# Altium PCB PCB1.PcbDoc
Units mm, origin at the board's own origin, x right, y up, seen from the top; angles counter-clockwise.
Board outline 17.5 x 27 mm, 2 copper layers (Top Layer, Bottom Layer); 11 components, 6 nets, 29 pads, 102 vias.
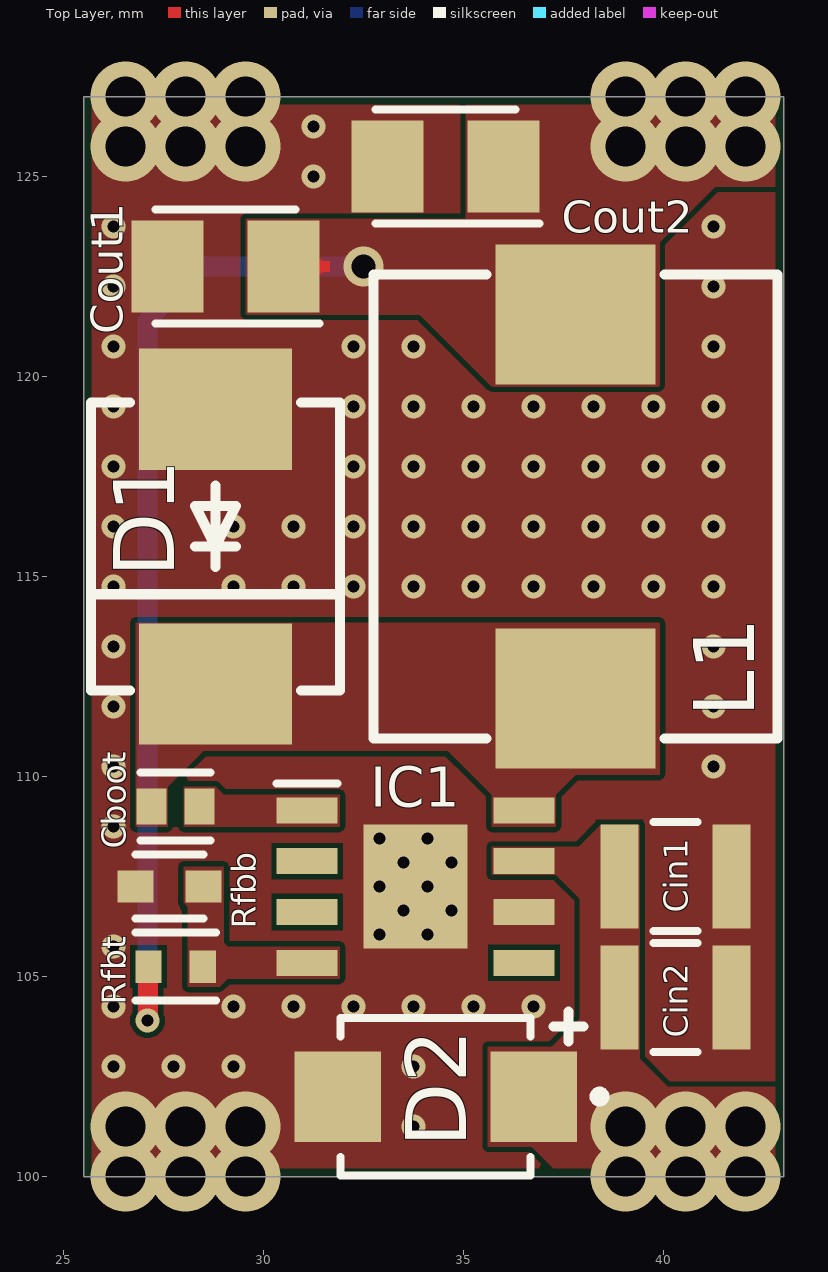
[diagram p0: Top Layer view]
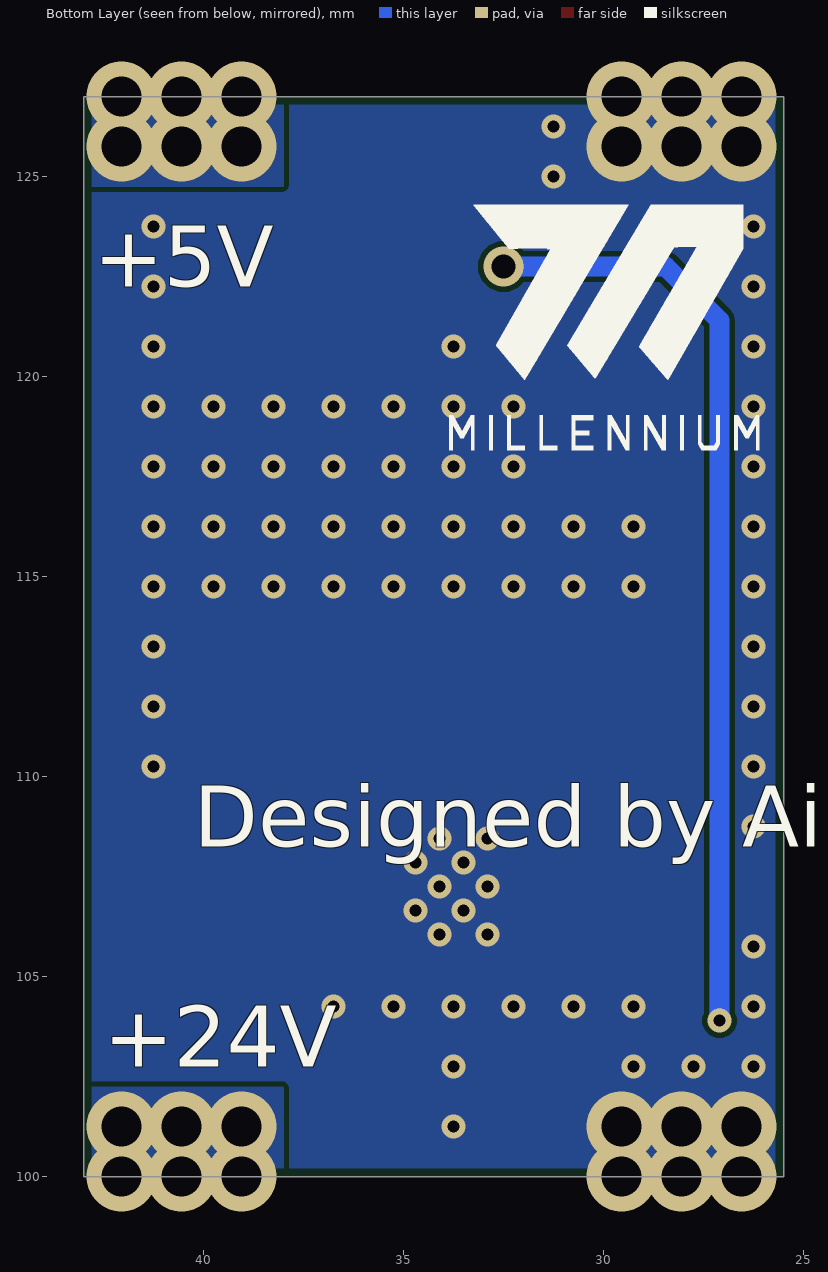
[diagram p1: Bottom Layer view, seen from below]
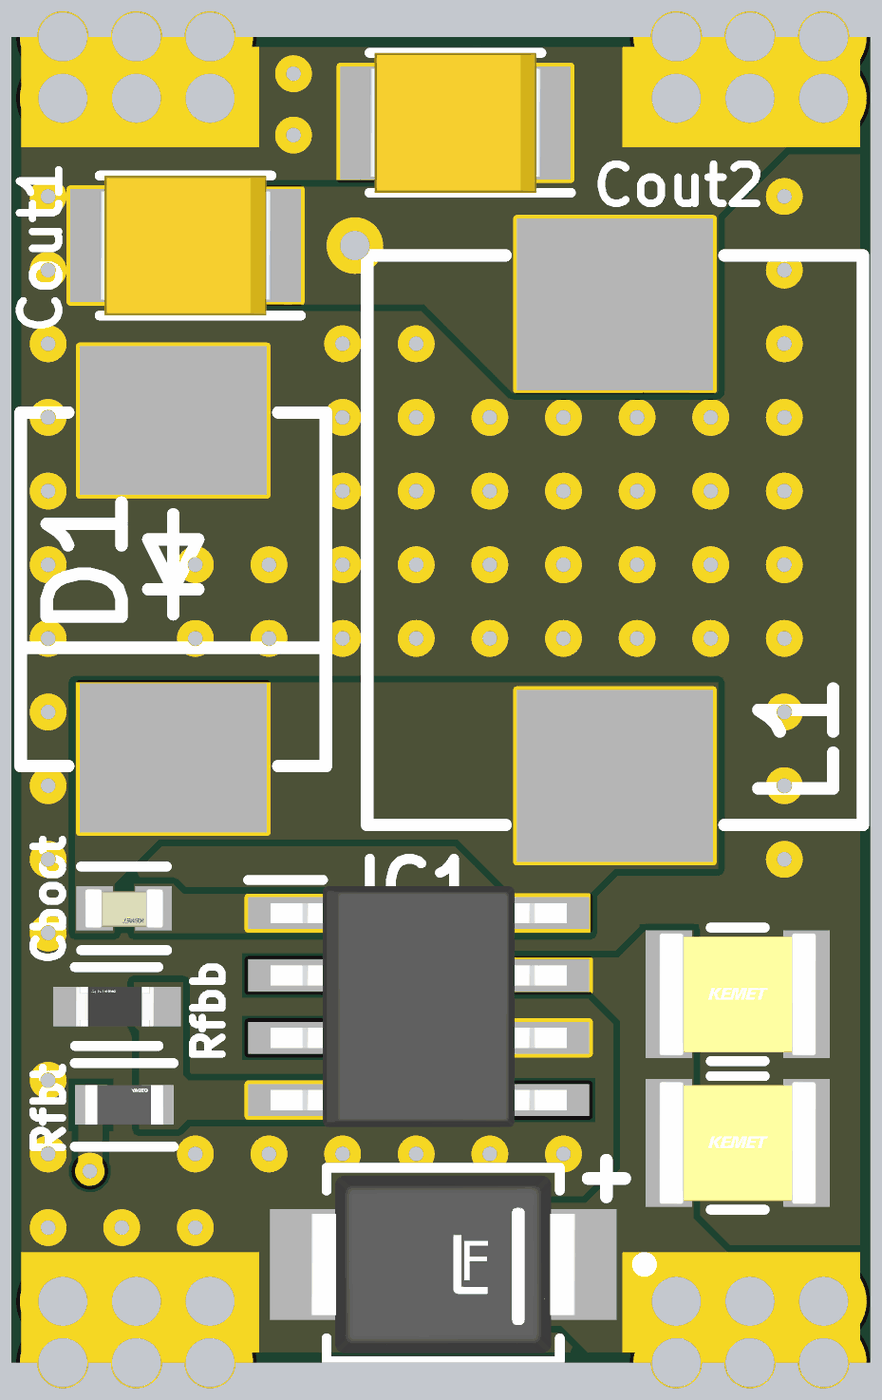
[diagram p2: 3D render of the assembled board from above, using the file's embedded part models]

## Layer stack, top to bottom
Top Solder: solder mask 0.0102, Solder Resist, Dk 3.5
Top Layer: signal copper 0.0356
Dielectric 1: dielectric 0.32, FR-4, Dk 4.8
Bottom Layer: signal copper 0.0356
Bottom Solder: solder mask 0.0102, Solder Resist, Dk 3.5

## Board outline
25.5,100 25.5,127 43,127 43,100

## Design rules (kind name [scope] priority, off if disabled: settings)
BoardOutlineClearance [All] p1: gap=0.2 ignorepadtopadclearanceinfootprint=FALSE
Clearance [All] p1: gap=0.127 ignorepadtopadclearanceinfootprint=FALSE except(0.25: Arc-Hole Track-Hole SMDPad-Hole THPad-Hole Via-Hole Fill-Hole Poly-Hole Region-Hole Text-Hole)
ComponentClearance [All] p1: gap=0.127 collisioncheckmode=3 verticalgap=0.127 showdistances=TRUE
DiffPairsRouting [All] p1: maxlimit=0.254 minlimit=0.127 mostfreqgap=0.127 toplayer_minwidth=0.127 toplayer_maxwidth=25.4 toplayer_prefwidth=0.127 bottomlayer_minwidth=0.127 bottomlayer_maxwidth=25.4 bottomlayer_prefwidth=0.127 maxuncoupledlength=12.7
Height [All] p1: minheight=0 maxheight=1816.048 prefheight=12.7
HoleSize [All] p1: absolutevalues=TRUE maxlimit=6.3 minlimit=0.3 maxpercent=80.000 minpercent=20.000
HoleToHoleClearance [All] p1: gap=0.25 allowstackedmicrovias=FALSE
MinimumAnnularRing [All] p1: minimumring=0.076
MinimumSolderMaskSliver [All] p1: minsoldermaskwidth=0
PlaneClearance [All] p1: clearance=0.127
PlaneConnect PlaneConnectPowerPads [InPadClass('PowerPads')] p1: planeconnectstyle=Direct reliefexpansion=0.508 reliefentries=4 reliefconductorwidth=0.254 reliefairgap=0.254
PlaneConnect [All] p2: pad.planeconnectstyle=Relief pad.reliefexpansion=0.3 pad.reliefentries=4 pad.reliefconductorwidth=0.127 pad.reliefairgap=0.127 via.planeconnectstyle=Direct via.reliefexpansion=0.3 via.reliefentries=4 via.reliefconductorwidth=0.127 via.reliefairgap=0.127
PolygonConnect PolygonConnectPowerPads [All vs (InPadClass('PowerPads'))] p1: connectstyle=Direct reliefconductorwidth=0.254 reliefentries=4 polygonreliefangle="90 Angle" airgapwidth=0.254
PolygonConnect [All] p2: connectstyle=Direct reliefconductorwidth=0.127 reliefentries=4 polygonreliefangle="90 Angle" airgapwidth=0.127
RoutingVias [All] p1: holewidth=0.3 width=0.6 viastyle="Through Hole" minholewidth=0.3 minwidth=0.6 maxholewidth=0.6 maxwidth=6.6
SilkToSilkClearance [All] p1: silktosilkclearance=0
SilkToSolderMaskClearance [IsPad] p1: minsilkscreentomaskgap=0.127 clearancetoexposedcopper=TRUE
SolderMaskExpansion [All] p1: expansion=0.075 istentingtop=FALSE
Width [All] p1: maxlimit=25.4 minlimit=0.127 preferedwidth=0.127 minimp=50.000000 maximp=50.000000 favimp=50.000000
20 further rules are at their usual default settings.

## Components (designator, comment, footprint, x,y, rotation, side; value= is the part's Value field where it differs from the comment)
Cboot "10nf 0603 x7r" FP-C0603C-CF-MFG 27.8,109.25 r180 top value="10,000 pF"
Cin1 "10uf 1210 x7r" FP-C1210C106K5RACTU-MFG 40.3,107.5 r0 top
Cin2 "10uf 1210 x7r" FP-C1210C106K5RACTU-MFG 40.3,104.475 r0 top
Cout1 "220uf 6.3v" CAPPM3528X210N 29.05,122.75 r180 top
Cout2 "220uf 6.3v" CAPPM3528X210N 34.55,125.25 r180 top
D1 "SS56" SMC_L7.1-W6.2-LS8.1-R-RD 28.8,115.75 r90 top
D2 "SMBJ26A" FP-SMBJ-MFG 34.3,102 r180 top
IC1 "TPS5450DDAR" SOIC127P600X170-9N 33.8,107.25 r0 top
L1 "=Value" IND-SMD_L11.6-W10.1 37.8,116.75 r90 top
Rfbb "3.24K 0603" FP-RT0603-MFG 27.65,107.25 r180 top value=3.24KΩ
Rfbt "10K 0603" FP-RC0603-0_55-IPC_C 27.8,105.25 r0 top

## Footprints (in the part's own frame and the unit in brackets; to place one, negate y for a bottom-side part, rotate by r counter-clockwise, add the part's x,y. Pads: shape width x height; smd on the part's side, far side on the other; paste and mask are expansions set on the pad)
CAPPM3528X210N [mm]
  rect 1.8x2.3 smd: 1(-1.45,0) 2(1.45,0)
  silkscreen extent -2.35,-1.43 1.75,1.43, body extent -1.75,-1.43 1.75,1.43, height 2.1
FP-C0603C-CF-MFG [mm]
  rect 0.75x0.9 smd paste+0 mask+0: 1(-0.6,0) 2(0.6,0)
  silkscreen extent -0.87,-0.85 0.88,0.85, body extent -1.2,-0.6 1.2,0.6, height 0.25
FP-C1210C106K5RACTU-MFG [mm]
  rect 0.95x2.6 smd paste+0 mask+0: 1(-1.4,0) 2(1.4,0)
  silkscreen extent -0.55,-1.36 0.55,1.36, body extent -2,-1.46 2,1.46, height 0.25
FP-RC0603-0_55-IPC_C [mm]
  rect 0.659x0.812 smd paste+0 mask+0: 1(-0.677,0) 2(0.677,0)
  silkscreen extent -1.01,-0.85 1.01,0.85, body extent -1.11,-0.55 1.11,0.55, height 0.25
FP-RT0603-MFG [mm]
  rect 0.9x0.8 smd paste+0 mask+0: 1(-0.85,0) 2(0.85,0)
  silkscreen extent -0.85,-0.81 0.86,0.8, body extent -1.4,-0.55 1.4,0.55, height 0.25
FP-SMBJ-MFG [mm]
  rect 2.16x2.26 smd paste+0 mask+0: 1(-2.45,0) 2(2.45,0)
  silkscreen extent -4.23,-1.97 2.37,1.97, body extent -3.63,-2.07 3.63,2.07, height 0.25
IND-SMD_L11.6-W10.1 [mm]
  rect 3.5x4 smd: 1(-4.8,0) 2(4.8,0)
  silkscreen extent -5.8,-5.05 5.8,5.05
SMC_L7.1-W6.2-LS8.1-R-RD [mm]
  rect 3.03x3.82 smd: 1(3.435,0) 2(-3.435,0)
  silkscreen extent -3.6,-3.11 3.6,3.11
SOIC127P600X170-9N [mm]
  rect 1.525x0.65 smd: 1(-2.712,1.905) 2(-2.712,0.635) 3(-2.712,-0.635) 4(-2.712,-1.905) 5(2.712,-1.905) 6(2.712,-0.635) 7(2.712,0.635) 8(2.712,1.905)
  rect 2.6x3.1 smd: 9(0,0)
  silkscreen extent -3.47,2.58 -1.95,2.58, body extent -3.01,-2.45 3.01,2.45, height 1.57

## Part data
Cboot: library part CMP-2006-03712-2, "CAP CER 10000PF 50V X7R 0603", Capacitance="10,000 pF", Manufacturer=KEMET, Manufacturer Part Number=C0603C103K5RACAUTO, Package=C0603C-CF, Temperature="-55°C to +125°C", Temperature Characteristic=X7R, Temperature Coefficient=30ppm/°C, Temperature Range High=+125°C, Temperature Range Low=-55°C, Tolerance=0.1, Voltage Rating="50 V", Automotive=Yes, Automotive Grade="Grade 1", Category=Cap, ComponentLink2Description=Datasheet, ComponentLink2URL=https://api.kemet.com/component-edge/download/datasheet/C0603C100J5GACAUTO.pdf, Device Class L1="Passive Components", Device Class L2=Capacitors, Device Class L3="Ceramic Capacitors", Digikey Description="CAP CER 10000PF 50V X7R 0603", Height=0.87mm, Lead Free=Yes, Material=Ceramic, Mouser Description="Multilayer Ceramic Capacitors MLCC - SMD/SMT .01UF 50V 10% 0603 AUTO", Octopart=https://octopart.com/c0603c103k5racauto-kemet-12563692, RoHS=TRUE
Cin1 Cin2: library part CMP-2000-07565-2, "CAP CER 10UF 50V X7R 1210", Capacitance=10uF, Case Code (Imperial)=1210, Case Code (Metric)=3225, Dielectric=X7R, Dielectric Material=Ceramic, Max Operating Temperature=125°C, Min Operating Temperature=-55°C, Package Quantity=1000, Tolerance=10%, Voltage=50V, Case/Package=1210, Depth=2.5mm, Height=2.5mm, Length=3.2mm, Mount="Surface Mount", Packaging="Tape and Reel", REACH SVHC="No SVHC", RoHS Compliant=Yes, Termination=SMD/SMT, Thickness=0.11inch, Voltage Rating=50V, Voltage Rating (DC)=50V, Weight=0.000564oz, Width=2.5mm
Cout1 Cout2: library part TLJB227M006R0500, "Capacitor Polarised", Manufacturer_Name="Kyocera AVX", Mouser Part Number=581-TLJB227M006R0500, Arrow Part Number=TLJB227M006R0500, Arrow Price/Stock=https://www.arrow.com/en/products/tljb227m006r0500/avx?region=nac, Datasheet Link=https://www.mouser.fr/datasheet/2/40/TLJ-3169755.pdf, Height=2.1mm, Manufacturer_Part_Number=TLJB227M006R0500, Mouser Price/Stock=https://www.mouser.co.uk/ProductDetail/AVX/TLJB227M006R0500?qs=o28%2FEEzBmj050XjtnkgQxA%3D%3D
D1: library part SS56C_C24138, Forward Voltage (Vf@If)=700mV@5A, JLCPCB Part Class="Extended Part", LCSC Part Name="电压:60V 电流:5A", Manufacturer=MDD(辰达半导体), Manufacturer Part=SS56C, Rectified Current=5A, Reverse Leakage Current (Ir)=1mA@60V, Reverse Voltage (Vr)=60V, Add into BOM=yes, Convert to PCB=yes, Datasheet=https://atta.szlcsc.com/upload/public/pdf/source/20240809/85001FE6B8209D29868878B4C087FFCD.pdf, Device=SS56C_C24138, Diode Configuration=独立式, Supplier=LCSC, Supplier Footprint=SMC(DO-214AB), Supplier Part=C24138, Symbol="SS56 SMC"
D2: library part CMP-08607-000063-1, "TVS DIODE 26V 42.1V DO214AA", Breakdown Voltage=28.9V, Clamping Voltage=42.1V, Manufacturer=Littelfuse, Max Junction Temp=+150°C, Package=SMBJ, Peak Pulse Current=14.3A, Peak Pulse Power=600W, Reverse Standoff Voltage=26V, Temperature="-65°C to +150°C", Temperature Range Low=-65°C, Automotive=No, Category=Diode, ComponentLink2Description=Datasheet, ComponentLink2URL=https://www.littelfuse.com/~/media/electronics/datasheets/tvs_diodes/littelfuse_tvs_diode_smbj_datasheet.pdf.pdf, Device Class L1="Circuit Protection", Device Class L2="TVS Diodes", Device Class L3=unset, Digikey Description="TVS DIODE 26V 42.1V DO214AA", Direction=Unidirectional, Height=2.61mm, Lead Free=Yes, Manufacturer Part Number=SMBJ26A, Mouser Description="TVS Diodes - Transient Voltage Suppressors 26Vr 600W 14.3A 5% UniDirectional", Number Of Channels=1, Octopart=https://octopart.com/smbj26a-littelfuse-350771, RoHS=TRUE, Temperature Range High=+150°C
IC1: "Integrated Circuit", Manufacturer_Name="Texas Instruments", Mouser Part Number=595-TPS5450DDAR, Arrow Part Number=TPS5450DDAR, Arrow Price/Stock=https://www.arrow.com/en/products/tps5450ddar/texas-instruments?region=nac, Datasheet Link=http://www.ti.com/general/docs/suppproductinfo.tsp?distId=10&gotoUrl=http%3A%2F%2Fwww.ti.com%2Flit%2Fgpn%2Ftps5450, Height=1.7mm, Manufacturer_Part_Number=TPS5450DDAR, Mouser Price/Stock=https://www.mouser.co.uk/ProductDetail/Texas-Instruments/TPS5450DDAR?qs=h%2FYsCRHtaqPaz8oWBdcCug%3D%3D
L1: library part CKST1004-10uH/M, DC Resistance (DCR)=30mΩ, JLCPCB Part Class="Extended Part", LCSC Part Name="10uH ±20% 7A", Manufacturer=CENKER(岑科), Rated Current=6.5A, Saturation Current (Isat)=7A, Tolerance=±20%, Add into BOM=yes, CKST1004-10uH/M=CKST1004-10uH/M, Convert to PCB=yes, Datasheet=https://atta.szlcsc.com/upload/public/pdf/source/20220510/B48FE89972EB9627500571FF6CB43AFA.pdf, Device=CKST1004-10uH/M, Manufacturer Part=CKST1004-10uH/M, Supplier=LCSC, Supplier Footprint=SMD,10.1x11.6mm, Supplier Part=C3002686, Symbol=CKST1004-10UH/M, Type=一体成型电感
Rfbb: library part CMP-03412-003421-1, "RES SMD 3.24K OHM 0.1% 1/10W", Manufacturer=Yageo, Manufacturer Part Number=RT0603BRD073K24L, Package=RT0603, Power Rating=0.1W, Resistance=3.24KΩ, Temperature="-55°C to +155°C", Temperature Coefficient="25 ppm/°C", Temperature Range High=+155°C, Temperature Range Low=-55°C, Tolerance=0.001, Voltage Rating=75V, Automotive=No, Category=Res, ComponentLink2Description=Datasheet, ComponentLink2URL=http://www.yageo.com/documents/recent/PYu-RT_1-to-0.01_RoHS_L_9.pdf, Composition="Thin Film", Device Class L1="Passive Components", Device Class L2=Resistors, Device Class L3="Chip SMD Resistors", Digikey Description="RES SMD 3.24K OHM 0.1% 1/10W", Footprint Url=http://www.yageo.com/exep/pages/download/literatures/PYu-R_Mount_10.pdf, Height=0.55mm, Ipc Land Pattern Name=RESC16080X45, Lead Free=Yes, Mouser Description="Thin Film Resistors - SMD 1/10W 3.24K ohm .1% 25ppm", Octopart=https://octopart.com/rt0603brd073k24l-yageo-1278728, RoHS=TRUE, Series=RT
Rfbt: library part CMP-2100-03664-2, "RES 10K OHM 1% 1/10W 0603", Case Code (Imperial)=0603, Case Code (Metric)=1608, Max Operating Temperature=155°C, Max Power Dissipation=100mW, Min Operating Temperature=-55°C, Resistance=10kR, Resistance Tolerance=1%, Resistor Type="Thick Film", Temperature Coefficient=100ppm/°C, Voltage Rating=75V, Voltage Rating (DC)=50V, Case/Package=0603, Construction=Rectangular, Depth=0.8mm, Features="Moisture Resistant", Height=0.45mm, Lead Free="Lead Free", Lead Pitch=0.3mm, Length=1.6mm, Military Standard=Not, Number of Pins=2, Number of Terminations=2, Packaging="Tape and Reel", Power Rating=100mW, RoHS Compliant=Yes, Series=RC, Size Code=0603, Termination=SMD/SMT, Tolerance=1%, Weight=7.1E-05oz, Width=0.8mm

## Via types
v1: diameter 0.6, hole 0.3, Top Layer to Bottom Layer, 77 vias
v2: diameter 1.75, hole 1, Top Layer to Bottom Layer, 24 vias
v3: diameter 1, hole 0.6, Top Layer to Bottom Layer, 1 vias

## Nets (pads, with @x,y where several pads share a name; then routed paths per layer and width w, separated by ;. In a path a pad name is that pad's centre, name@x,y a point inside that pad or via, vN(x,y) a via of type N, cw(c..) or ccw(c..) an arc to the next point about the centre after c; other vN are vias at no path point)
+5V: Cout1.1 Cout2.1 L1.2 Rfbt.1 | length 24.8
  Top Layer w0.254: v1(27.1,103.9) v1@27.112,103.912 ; Rfbt.1@27.112,105.238 Rfbt.1
  Top Layer w0.5: v1@27.112,103.912 Rfbt.1@27.112,105.238
  Bottom Layer w0.5: v1(27.1,103.9) 27.1,121.4 28.45,122.75 v3(32.5,122.75)
  other v2: 39.05,125.75 40.55,125.75 42.05,125.75 39.05,127 40.55,127 42.05,127
+24V: Cin1.1 Cin2.1 D2.1 IC1.7
  other v2: 39.05,100 40.55,100 42.05,100 39.05,101.25 40.55,101.25 42.05,101.25
GND: Cin1.2 Cin2.2 Cout1.2 Cout2.2 D1.1 D2.2 IC1.6 IC1.9 Rfbb.2
  other v1: 33.75,101.25 26.25,102.75 27.75,102.75 29.25,102.75 33.75,102.75 26.25,104.25 29.25,104.25 30.75,104.25 32.25,104.25 33.75,104.25 35.25,104.25 36.75,104.25 26.25,105.75 32.9,106.05 34.1,106.05 33.5,106.65 34.7,106.65 32.9,107.25 34.1,107.25 33.5,107.85 34.7,107.85 32.9,108.45 34.1,108.45 26.25,108.75 26.25,110.25 41.25,110.25 26.25,111.75 41.25,111.75 26.25,113.25 41.25,113.25 26.25,114.75 29.25,114.75 30.75,114.75 32.25,114.75 33.75,114.75 35.25,114.75 36.75,114.75 38.25,114.75 39.75,114.75 41.25,114.75 26.25,116.25 29.25,116.25 30.75,116.25 32.25,116.25 33.75,116.25 35.25,116.25 36.75,116.25 38.25,116.25 39.75,116.25 41.25,116.25 26.25,117.75 32.25,117.75 33.75,117.75 35.25,117.75 36.75,117.75 38.25,117.75 39.75,117.75 41.25,117.75 26.25,119.25 32.25,119.25 33.75,119.25 35.25,119.25 36.75,119.25 38.25,119.25 39.75,119.25 41.25,119.25 26.25,120.75 32.25,120.75 33.75,120.75 41.25,120.75 26.25,122.25 41.25,122.25 26.25,123.75 41.25,123.75 31.25,125 31.25,126.25
  other v2: 26.55,100 28.05,100 29.55,100 26.55,101.25 28.05,101.25 29.55,101.25 26.55,125.75 28.05,125.75 29.55,125.75 26.55,127 28.05,127 29.55,127
NetCboot_1: Cboot.1 IC1.1
NetCboot_2: Cboot.2 D1.2 IC1.8 L1.1
VSENSE: IC1.4 Rfbb.1 Rfbt.2
pads on no net: IC1.2 IC1.3 IC1.5

## Polygon pours and split planes (outlines as drawn)
+24V on Top Layer "+24V_L01_P000" (solid, pour order 0): 37.9,106.95 37.9,103.95 37.2,103.25 35.6,103.25 35.6,100.75 36.7,100.75 37.45,100 43.05,100 43.05,102.25 40.1,102.25 39.4,102.95 39.4,108.8 38.425,108.8 37.875,108.25 35.7,108.25 35.7,107.55 37.3,107.55
GND on Top Layer "GND_L01_P010" (solid, pour order 10): 24.5,129 44.5,129 44.5,97 24.5,97
VSENSE on Top Layer "VSENSE_L01_P001" (solid, pour order 1): 28.1,106.75 28,106.85 28,107.75 29,107.75 29,105.85 29.1,105.75 31.9,105.75 31.9,104.95 29.1,104.95 28.9,104.75 28.1,104.75
NetCboot_1 on Top Layer "NETCBOOT_1_L01_P003" (solid, pour order 3): 28,108.75 31.9,108.75 31.9,109.55 29,109.55 28.8,109.75 28,109.75
NetCboot_2 on Top Layer "NETCBOOT_2_L01_P004" (solid, pour order 4): 28.5,110.65 34.6,110.65 35.7,109.55 35.7,108.75 37.3,108.75 37.3,109.55 37.8,110.05 39.9,110.05 39.9,113.85 26.8,113.85 26.8,108.75 27.6,108.75 27.6,109.75
+5V on Top Layer "+5V_L01_P005" (solid, pour order 5): 29.55,123.95 29.55,121.55 33.9,121.55 35.7,119.75 39.9,119.75 39.9,123.35 41.3,124.75 43,124.75 43,128 38.55,128 37.55,127 35.05,127 35.05,123.95 34.5,123.95
GND on Bottom Layer "GND_L02_P011" (solid, pour order 11): 23.9,128.9 43.9,128.9 43.9,96.9 23.9,96.9
+24V on Bottom Layer "+24V_L02_P009" (solid, pour order 9): 43,99 43,102.25 38,102.25 38,99
+5V on Bottom Layer "+5V_L02_P008" (solid, pour order 8): 38,128.25 38,124.75 43,124.75 43,128.25
no net on Top Solder "NONET_L02_P012" (solid): 42.95,99 42.95,102.25 37.95,102.25 37.95,99
no net on Top Solder "NONET_L02_P012" (solid): 30.55,99 30.55,102.25 25.45,102.25 25.45,99
no net on Top Solder "NONET_L02_P012" (solid): 37.95,128 37.95,124.75 43.05,124.75 43.05,128
no net on Top Solder "NONET_L02_P012" (solid): 25.45,128 25.45,124.75 30.55,124.75 30.55,128
+24V on Bottom Solder "NONET_L02_P012" (solid, pour order 12): 43,99 43,102.25 38,102.25 38,99
GND on Bottom Solder "NONET_L02_P012" (solid): 30.6,99 30.6,102.25 25.5,102.25 25.5,99
GND on Bottom Solder "NONET_L02_P012" (solid): 38,128 38,124.75 43.1,124.75 43.1,128
GND on Bottom Solder "NONET_L02_P012" (solid): 25.5,128 25.5,124.75 30.6,124.75 30.6,128

## Silkscreen, mask and mechanical layers (free items; w line width, h text height)
Top Overlay:
  lines w0.254: 37.25,103.75 38,103.75 ; 37.625,103.375 37.625,103.75 37.625,104.125
Bottom Overlay:
  drawing of 12 lines, arcs and shapes, not listed
  text "+5V" at 42.75,122.25 h1.52
  text "Designed by Aisa" at 40.25,108.25 h1.52
  text "+24V" at 42.5,102.75 h1.52
Mechanical 1:
  the board outline again, w0.25